# Altium PCB CPNPCB.PcbDoc
Units mil, origin at the board's own origin, x right, y up, seen from the top; angles counter-clockwise.
Board outline 5530 x 3630 mil, 2 copper layers (Top Layer, Bottom Layer); 24 components, 21 nets, 97 pads, 23 vias.
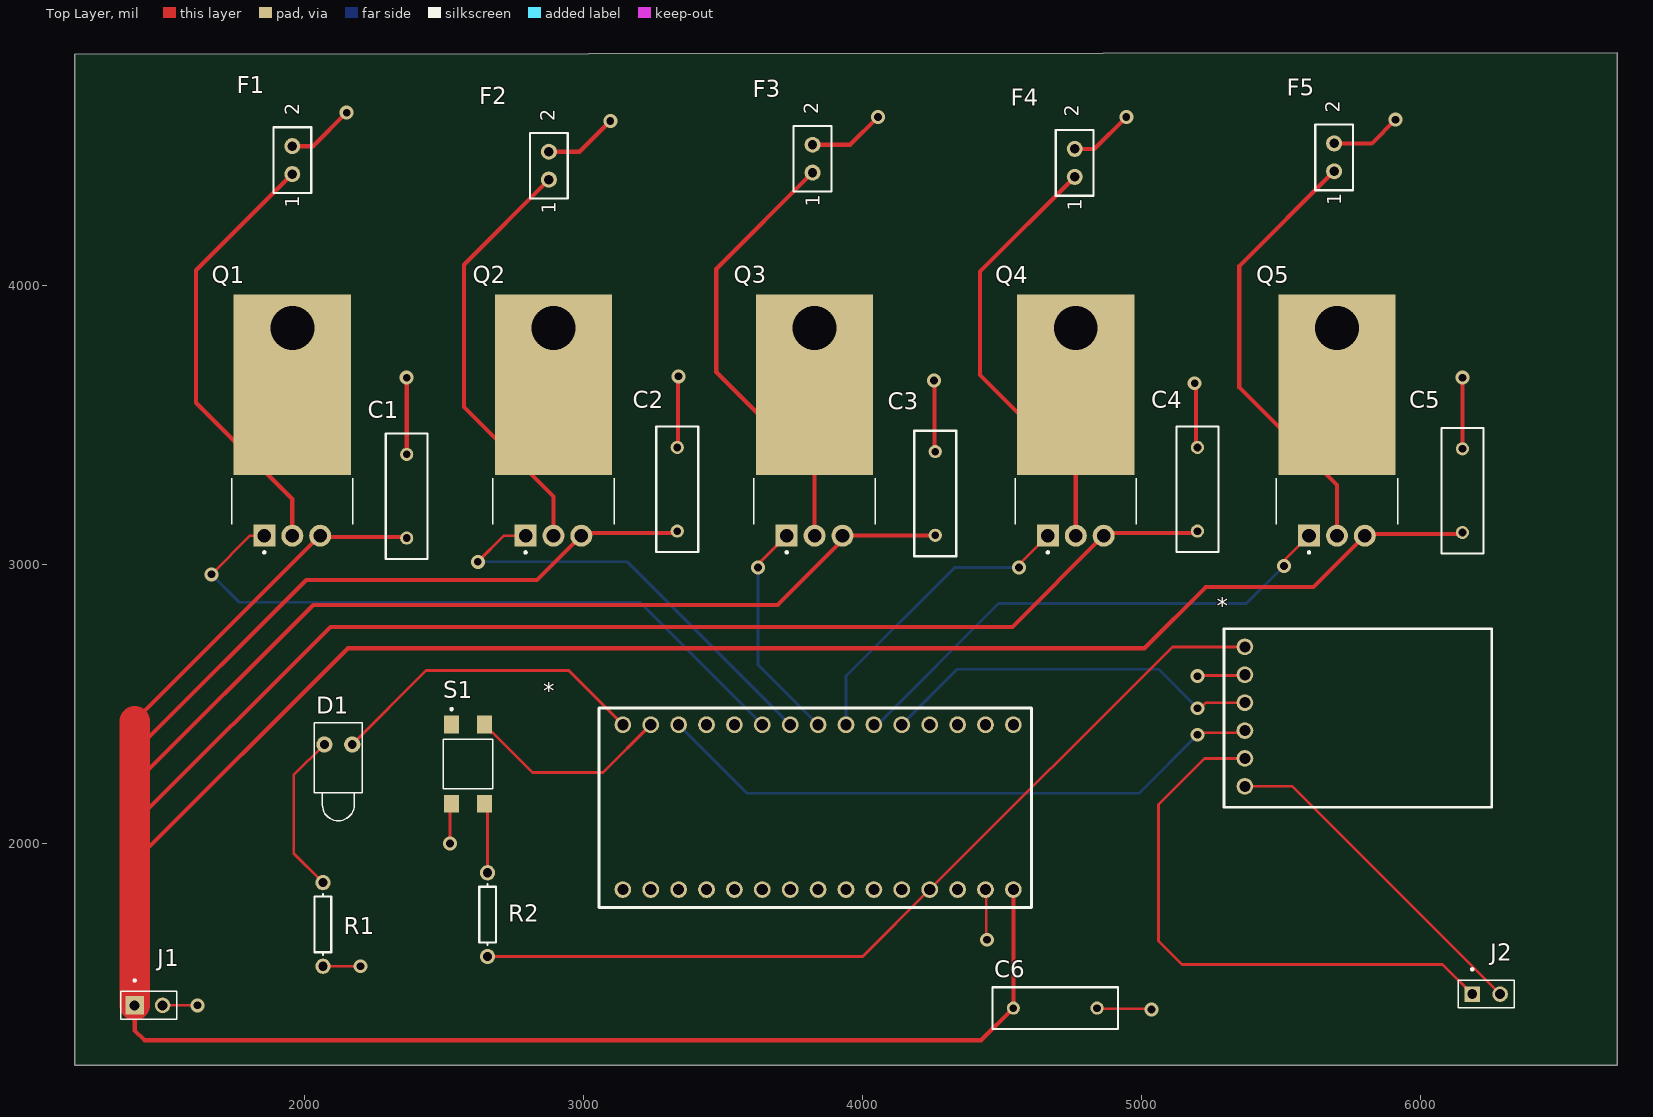
[diagram p0: Top Layer view]
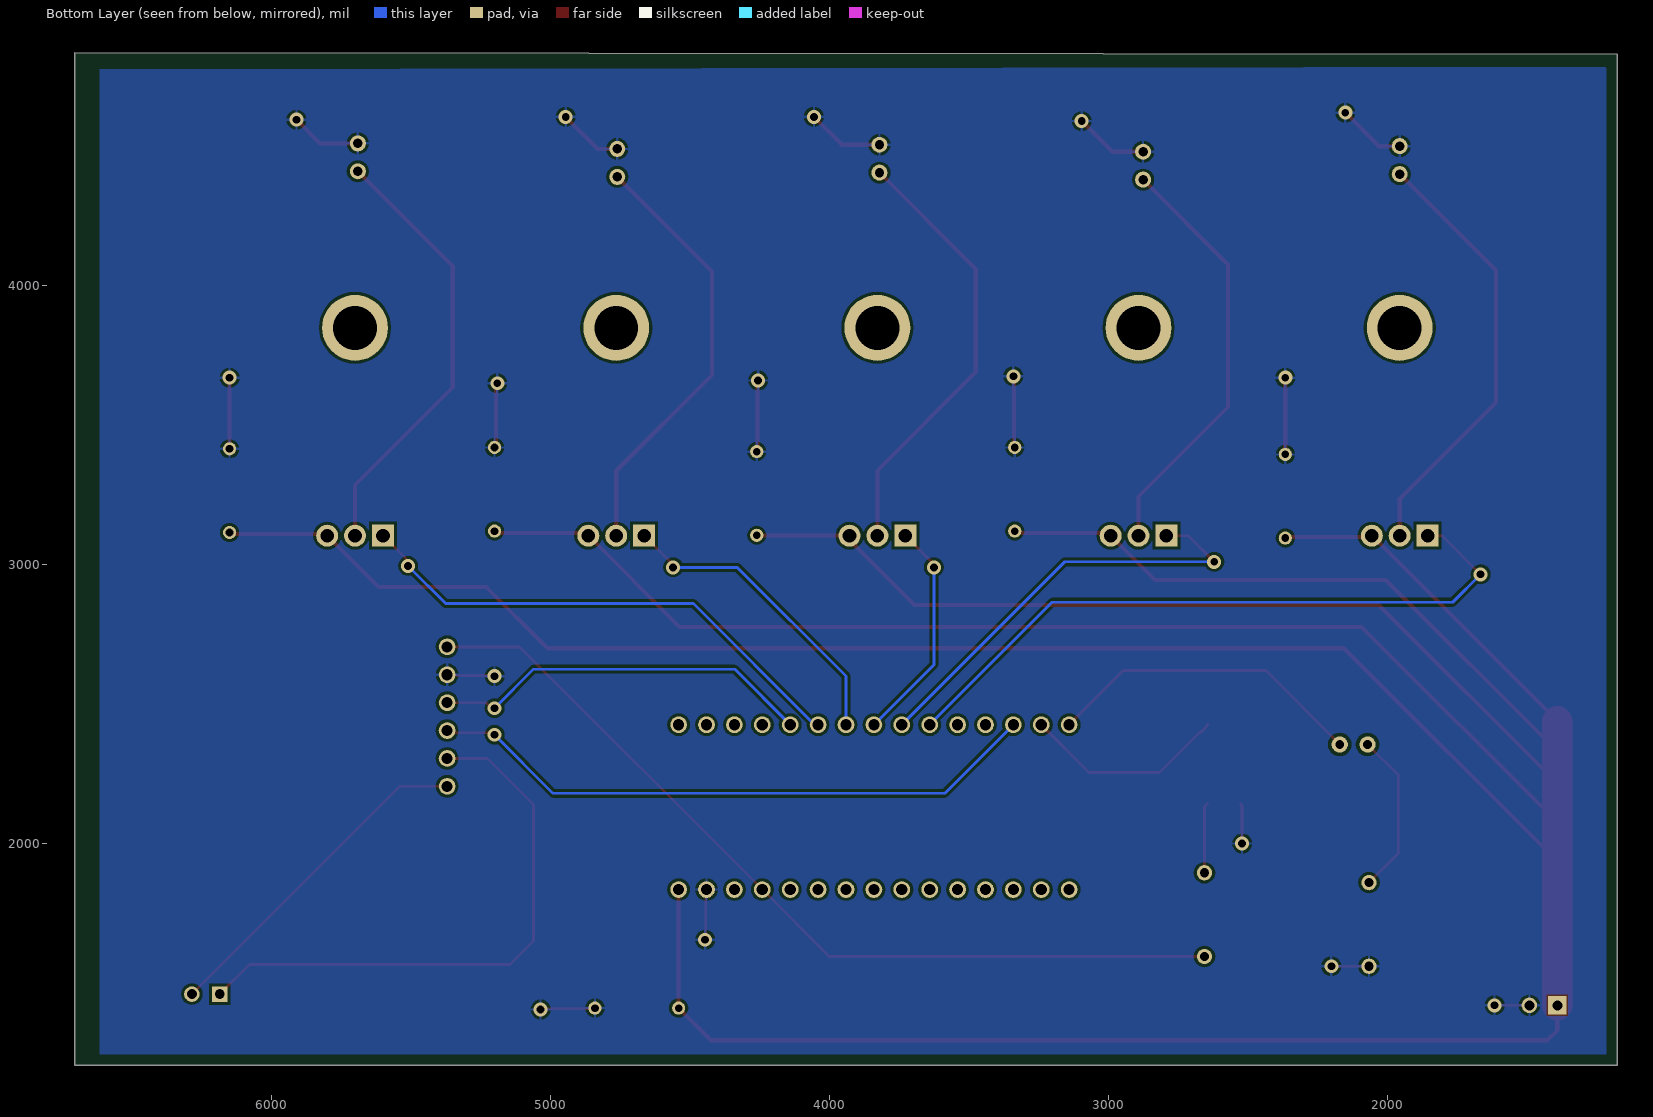
[diagram p1: Bottom Layer view, seen from below]

## Layer stack, top to bottom
Top Solder: solder mask 0.4, Solder Resist, Dk 3.5
Top Layer: signal copper 1.4
Dielectric 1: dielectric 12.6, FR-4, Dk 4.8
Bottom Layer: signal copper 1.4
Bottom Solder: solder mask 0.4, Solder Resist, Dk 3.5

## Board outline
1175,4830 1175,1205 6705,1205 6705,4835

## Design rules (kind name [scope] priority, off if disabled: settings)
BoardOutlineClearance [All] p1: gap=7.87 ignorepadtopadclearanceinfootprint=FALSE
Clearance [All] p1: gap=5 ignorepadtopadclearanceinfootprint=TRUE except(10: Arc-Hole Track-Hole SMDPad-Hole THPad-Hole Via-Hole Fill-Hole Poly-Hole Region-Hole Text-Hole)
ComponentClearance [All] p1: gap=5 collisioncheckmode=3 verticalgap=5 showdistances=TRUE
DiffPairsRouting [All] p1: maxlimit=10 minlimit=5 mostfreqgap=5 toplayer_minwidth=5 toplayer_maxwidth=1000 toplayer_prefwidth=5 bottomlayer_minwidth=5 bottomlayer_maxwidth=1000 bottomlayer_prefwidth=5 maxuncoupledlength=500
Height [All] p1: minheight=0 maxheight=71497.94 prefheight=500
HoleSize [All] p1: absolutevalues=TRUE maxlimit=248.03 minlimit=11.81 maxpercent=80.000 minpercent=20.000
HoleToHoleClearance [All] p1: gap=10 allowstackedmicrovias=FALSE
MinimumAnnularRing [All] p1: minimumring=6
MinimumSolderMaskSliver [All] p1: minsoldermaskwidth=6
PlaneClearance [All] p1: clearance=5
PlaneConnect PlaneConnectPowerPads [InPadClass('PowerPads')] p1: planeconnectstyle=Direct reliefexpansion=20 reliefentries=4 reliefconductorwidth=10 reliefairgap=10
PlaneConnect [All] p2: pad.planeconnectstyle=Relief pad.reliefexpansion=11.81 pad.reliefentries=4 pad.reliefconductorwidth=5 pad.reliefairgap=5 via.planeconnectstyle=Direct via.reliefexpansion=11.81 via.reliefentries=4 via.reliefconductorwidth=5 via.reliefairgap=5
PolygonConnect PolygonConnectPowerPads [All vs (InPadClass('PowerPads'))] p1: connectstyle=Direct reliefconductorwidth=10 reliefentries=4 polygonreliefangle="90 Angle" airgapwidth=10
PolygonConnect [All] p2: thpad.connectstyle=Relief thpad.reliefconductorwidth=5 thpad.reliefentries=4 thpad.polygonreliefangle="90 Angle" thpad.airgapwidth=5 smdpad.connectstyle=Relief smdpad.reliefconductorwidth=5 smdpad.reliefentries=4 smdpad.polygonreliefangle="90 Angle" smdpad.airgapwidth=5 via.connectstyle=Direct via.reliefconductorwidth=5 via.reliefentries=4 via.polygonreliefangle="90 Angle" via.airgapwidth=5
RoutingVias [All] p1: holewidth=11.81 width=23.62 viastyle="Through Hole" minholewidth=11.81 minwidth=23.62 maxholewidth=23.62 maxwidth=259.84
SilkToSilkClearance [All] p1: silktosilkclearance=5
SilkToSolderMaskClearance [IsPad] p1: minsilkscreentomaskgap=5 clearancetoexposedcopper=TRUE
SolderMaskExpansion [All] p1: expansion=2 istentingtop=FALSE
UnRoutedNet [All] p1: checkbadconnections=TRUE
Width Width_10mil [All] p1: maxlimit=1000 minlimit=10 preferedwidth=10 minimp=50.000000 maximp=50.000000 favimp=50.000000
Width Width_6mil [All] p2: maxlimit=1000 minlimit=6 preferedwidth=6 minimp=50.000000 maximp=50.000000 favimp=50.000000
Width Power_20mil [All] p3: maxlimit=1000 minlimit=20 preferedwidth=20 minimp=50.000000 maximp=50.000000 favimp=50.000000
Width Power_12mil [All] p4: maxlimit=1000 minlimit=12 preferedwidth=12 minimp=50.000000 maximp=50.000000 favimp=50.000000
Width Width_5mil [All] p5: maxlimit=1000 minlimit=5 preferedwidth=5 minimp=50.000000 maximp=50.000000 favimp=50.000000
19 further rules are at their usual default settings.

## Components (designator, comment, footprint, x,y, rotation, side; value= is the part's Value field where it differs from the comment)
* "MCP2551" MCP2551-Footprint-1 5570,2455 r0 top
* "NUCLEO-F303K8" NUCLEO-F303K8-Footprint-1 3790,2130.5 r270 top
C1 "Cap" RAD-0.3 2365,3245 r270 top value=1uF
C2 "Cap" RAD-0.3 3335,3270 r270 top value=100pF
C3 "Cap" RAD-0.3 4260,3255 r270 top value=100pF
C4 "Cap" RAD-0.3 5200,3270 r270 top value=100pF
C5 "Cap" RAD-0.3 6150,3265 r270 top value=100pF
C6 "Cap" RAD-0.3 4690,1410 r180 top value=100pF
D1 "LED1" LED-1 2120,2355 r270 top
F1 "SAMTEC-SLW-102-01-X-S" SAMTEC-SLW-102-01-X-S 1955,4450 r90 top
F2 "SAMTEC-SLW-102-01-X-S" SAMTEC-SLW-102-01-X-S 2875,4430 r90 top
F3 "SAMTEC-SLW-102-01-X-S" SAMTEC-SLW-102-01-X-S 3820,4455 r90 top
F4 "SAMTEC-SLW-102-01-X-S" SAMTEC-SLW-102-01-X-S 4760,4440 r90 top
F5 "SAMTEC-SLW-102-01-X-S" SAMTEC-SLW-102-01-X-S 5690,4460 r90 top
J1 "215297-2" TE_215297-2#1 1440,1420 r0 top
J2 "215297-2" TE_215297-2#2 6235,1460 r0 top
Q1 "CSD18502KCS" TO254P1651X1067X470-3 1855,3103.66 r0 top
Q2 "CSD18502KCS" TO254P1651X1067X470-3 2791.25,3103.66 r0 top
Q3 "CSD18502KCS" TO254P1651X1067X470-3 3727.5,3103.66 r0 top
Q4 "CSD18502KCS" TO254P1651X1067X470-3 4663.75,3103.66 r0 top
Q5 "CSD18502KCS" TO254P1651X1067X470-3 5600,3103.66 r0 top
R1 "Res1" AXIAL-0.3 2065,1710 r90 top value=300
R2 "Res1" AXIAL-0.3 2655,1745 r90 top value=1K
S1 "TL3305BF260QG" SW_TL3305BF260QG 2585,2285 r270 top

## Footprints (in the part's own frame and the unit in brackets; to place one, negate y for a bottom-side part, rotate by r counter-clockwise, add the part's x,y. Pads: shape width x height; smd on the part's side, far side on the other; paste and mask are expansions set on the pad)
AXIAL-0.3 [mm] "Axial Device, Thru-Hole; 2 Leads; 0.3 in Pin Spacing"
  round 1.4 hole 0.85: 1(-3.81,0) 2(3.81,0)
  silkscreen extent -2.77,-0.76 2.77,0.76
LED-1 [mil] "LED; 2 Leads"
  round 58 hole 31.5: 1(0,50) 2(0,-50)
  silkscreen extent -79,-87 274,87
MCP2551-Footprint-1 [mil]
  round 60 hole 40: 1(-200,250) 2(-200,150) 3(-200,50) 4(-200,-50) 5(-200,-150) 6(-200,-250)
  silkscreen extent -275,-325 685,315
NUCLEO-F303K8-Footprint-1 [mil]
  round 60 hole 40: 1(-295.5,750) 2(-295.5,650) 3(-295.5,550) 4(-295.5,450) 5(-295.5,350) 6(-295.5,250) 7(-295.5,150) 8(-295.5,50) 9(-295.5,-50) 10(-295.5,-150) 11(-295.5,-250) 12(-295.5,-350) 13(-295.5,-450) 14(-295.5,-550) 15(-295.5,-650) 16(295.5,-650) 17(295.5,-550) 18(295.5,-450) 19(295.5,-350) 20(295.5,-250) 21(295.5,-150) 22(295.5,-50) 23(295.5,50) 24(295.5,150) 25(295.5,250) 26(295.5,350) 27(295.5,450) 28(295.5,550) 29(295.5,650) 30(295.5,750)
  silkscreen extent -355,-735 360,815
RAD-0.3 [mm] "Radial Cap, Thru-Hole; 2 Leads; 0.3 in Pin Spacing"
  round 1.2 hole 0.7: 1(-3.81,0) 2(3.81,0)
  silkscreen extent -5.71,-1.91 5.71,1.91
SAMTEC-SLW-102-01-X-S [mm]
  round 1.46 hole 0.86 mask+0.051: 1(-1.27,0) 2(1.27,0)
  silkscreen extent -2.99,-1.72 2.99,1.72
SW_TL3305BF260QG [mm]
  rect 1.6x1.4 smd: 1(-3.6,-1.5) 2(3.6,-1.5) 3(-3.6,1.5) 4(3.6,1.5)
  silkscreen extent -5.1,-2.25 2.25,2.25, body extent -3.75,-2.25 3.75,2.25, height 5
TE_215297-2#1 [mil]
  rect 65x65 hole 35.43: 1(-50,0)
  round 55.43 hole 35.43: 2(50,0)
  silkscreen extent -100,-50 100,93, body extent -100,0 100,394, height 50
TE_215297-2#2 [mil]
  rect 55.43x55.43 hole 35.43: 1(-50,0)
  round 55.43 hole 35.43: 2(50,0)
  silkscreen extent -100,-50 100,93, body extent -100,0 100,394, height 50
TO254P1651X1067X470-3 [mm]
  rect 2x2 hole 1.24: 1(0,0)
  round 2 hole 1.24: 2(2.54,0) 3(5.08,0)
  rect 10.67x16.43 smd: 4(2.54,13.75)
  round 6 hole 4: 4.1(2.54,18.925)
  silkscreen extent -2.98,-1.62 8.06,5.22, body extent -5.08,0 5.08,4.55, height 19.65

## Part data
*: library part MCP2551-1
*: library part nucleof303k8-1, "Boards/Accessories"
C1 C2 C3 C4 C5 C6: "Capacitor", LatestRevisionDate=17-Jul-2002, LatestRevisionNote="Re-released for DXP Platform.", PackageDescription="Radial Cap, Thru-Hole; 2 Leads; 0.3 in Pin Spacing", PackageReference=RAD-0.3, Published=8-Jun-2000, Publisher="Altium Limited"
D1: "Typical RED GaAs LED", LatestRevisionDate=08-Jul-2005, LatestRevisionNote="Mech Layer 1 removed.", PackageDescription="LED; 2 Leads", PackageReference=LED-1, Published=8-Jun-2000, Publisher="Altium Limited"
F1 F2 F3 F4 F5 J1 J2 S1: Package=None, Availability=Unavailable, Price=None
  F1 F2 F3 F4 F5: MF="{'manufacturer': u'Samtec Inc.'}", MP=SAMTEC-SLW-102-01-X-S
  J1 J2: MF="{'manufacturer': u'TE Connectivity'}", MP=215297-2
  S1: MF="{'manufacturer': u'E-Switch'}", MP=TL3305BF260QG
Q1 Q2 Q3 Q4 Q5: "40-V, N-Channel NexFET Power MOSFETs 3-TO-220 -55 to 150", Package=None, Availability=Unavailable, MF="{'manufacturer': u'Texas Instruments'}", MP=CSD18502KCS, Price=None
R1 R2: "Resistor", LatestRevisionDate=17-Jul-2002, LatestRevisionNote="Re-released for DXP Platform.", PackageDescription="Axial Device, Thru-Hole; 2 Leads; 0.3 in Pin Spacing", PackageReference=AXIAL-0.3, Published=8-Jun-2000, Publisher="Altium Limited"

## Via types
v1: diameter 50, hole 28, Top Layer to Bottom Layer, 23 vias

## Nets (pads, with @x,y where several pads share a name; then routed paths per layer and width w, separated by ;. In a path a pad name is that pad's centre, name@x,y a point inside that pad or via, vN(x,y) a via of type N, cw(c..) or ccw(c..) an arc to the next point about the centre after c; other vN are vias at no path point)
CANH: *.5@5370,2305 J2.1 | length 2071.5
  Top Layer w10: *.5@5370,2305 5225,2305 5060,2140 5060,1650.86 5144.07,1566.79 6078.21,1566.79 J2.1
CANL: *.6@5370,2205 J2.2 | length 1223.6
  Top Layer w10: *.6@5370,2205 5540,2205 J2.2
CANRX: *.4@5370,2405 *.13 | length 2225.1
  Top Layer w10: v1(5200,2390) 5207.5,2397.5 5362.5,2397.5 *.4@5370,2405
  Bottom Layer w10: *.13 3586,2180 4990,2180 v1(5200,2390)
CANTX: *.3@5370,2505 *.5@4140,2426 | length 1378.7
  Top Layer w10: v1(5200,2485) 5210.82,2485 5230.82,2505 *.3@5370,2505
  Bottom Layer w10: *.5@4140,2426 4339,2625 5060,2625 v1(5200,2485)
D3: *.6@4040,2426 Q5.1 | length 1851.6
  Top Layer w10: v1(5510,2995) 5517.65,3002.65 5517.65,3021.32 Q5.1
  Bottom Layer w10: *.6@4040,2426 4052.57,2426 4486.57,2860 5375,2860 v1(5510,2995)
D4: *.7 Q4.1 | length 1112.2
  Top Layer w10: v1(4560,2990) 4560,2999.91 Q4.1
  Bottom Layer w10: *.7 3940,2600 4330,2990 v1(4560,2990)
D5: *.8 Q3.1 | length 809.2
  Top Layer w10: v1(3625,2990) 3632.65,2997.65 3632.65,3008.82 Q3.1
  Bottom Layer w10: v1(3625,2990) 3625,2641 *.8
D6: *.9 Q2.1 | length 1571.9
  Top Layer w10: v1(2620,3010) 2713.66,3103.66 Q2.1
  Bottom Layer w10: v1(2620,3010) 3156,3010 *.9
D7: *.10 Q1.1 | length 2445.7
  Top Layer w10: v1(1665,2965) 1803.66,3103.66 Q1.1
  Bottom Layer w10: v1(1665,2965) 1765,2865 3201,2865 *.10
GND: *.2@5370,2605 *.29 C1.1 C2.1 C3.1 C4.1 C5.1 C6.1 F1.2 F2.2 F3.2 F4.2 F5.2 J1.2 R1.1 S1.2 | length 3529.8
  Top Layer w10: J1.2 v1(1615,1420) ; R1.1 v1(2200,1560) ; v1(2520,2000) 2520,2137.32 S1.2 ; C2.1@3335,3440 C2.1 C2.1@3337.5,3422.5 ; v1@3337.5,3672.5 v1(3340,3675) ; v1(4255,3660) v1@4257.5,3657.5 ; C3.1@4257.5,3407.5 C3.1 ; *.29 4442.5,1832.5 4442.5,1657.5 v1(4445,1655) ; C6.1 4842.5,1407.5 5032.5,1407.5 v1(5035,1405) ; v1(5190,3650) v1@5195,3645 ; C4.1@5195,3425 C4.1 ; v1(5200,2600) 5202.5,2602.5 5367.5,2602.5 *.2@5370,2605
  Top Layer w15: F1.2 2030,4500 v1(2150,4620) ; C1.1 v1(2365,3670) ; F2.2 2985,4480 v1(3095,4590) ; C2.1@3337.5,3422.5 v1@3337.5,3672.5 ; F3.2 3955,4505 v1(4055,4605) ; C3.1@4257.5,3407.5 v1@4257.5,3657.5 ; F4.2 4830,4490 v1(4945,4605) ; C4.1@5195,3425 v1@5195,3645 ; F5.2 5825,4510 v1(5910,4595) ; C5.1 v1(6150,3670)
LVLine: *.30 C1.2 C2.2 C3.2 C4.2 C5.2 C6.2 J1.1 Q1.3 Q2.3 Q3.3 Q4.3 Q5.3 | length 21011.8
  Top Layer w15: J1.1 1390,1330 1425,1295 4425,1295 C6.2 *.30 ; 1390,1935 2155,2700 5010,2700 5230,2920 5616.34,2920 Q5.3 5805.67,3109.33 6144.33,3109.33 C5.2 ; 1390,2075 2091.49,2776.49 4536.58,2776.49 Q4.3 4872.96,3112.87 5192.87,3112.87 C4.2 ; 1390,2215 2030,2855 3695,2855 3927.5,3087.5 Q3.3 3928.17,3104.33 4259.33,3104.33 C3.2 ; 1390,2330 2005,2945 2832.59,2945 Q2.3 3000.46,3112.87 3327.87,3112.87 C2.2 ; 1390,2438.66 Q1.3 2059.33,3099.33 2360.67,3099.33 C1.2
  Top Layer w110: J1.1 1390,1935 1390,2075 1390,2215 1390,2330 1390,2438.66
Net*_1: *.1@5370,2705 *.27 R2.1 | length 3174.8
  Top Layer w10: R2.1 4000,1595 *.27 5110,2705 *.1@5370,2705
Net*_14: *.14 S1.3 | length 740.2
  Top Layer w10: S1.3 2644.06,2422.8 2666.61,2400.24 2670.55,2400.24 2815.79,2255 3069,2255 *.14
Net*_15: *.15 D1.1 | length 1160.1
  Top Layer w10: D1.1 2435,2620 2946,2620 *.15
NetD1_2: D1.2 R1.2 | length 584.1
  Top Layer w10: R1.2 1960,1965 1960,2245 D1.2
NetF1_1: F1.1 Q1.2 Q1.4 Q1.4.1 | length 1582.1
  Top Layer w15: Q1.2 1955,3235 1610,3580 1610,4055 F1.1
NetF2_1: F2.1 Q2.2 Q2.4 Q2.4.1 | length 1535.7
  Top Layer w15: F2.1 2570,4075 2570,3565 2891.25,3243.75 Q2.2
NetF3_1: F3.1 Q3.2 Q3.4 Q3.4.1 | length 1590.3
  Top Layer w15: F3.1 3475,4060 3475,3690 3827.5,3337.5 Q3.2
NetF4_1: F4.1 Q4.2 Q4.4 Q4.4.1 | length 1569.6
  Top Layer w15: F4.1 4420,4050 4420,3680 4763.75,3336.25 Q4.2
NetF5_1: F5.1 Q5.2 Q5.4 Q5.4.1 | length 1592.1
  Top Layer w15: F5.1 5350,4070 5350,3635 5700,3285 Q5.2
NetR2_2: R2.2 S1.4 | length 252.8
  Top Layer w10: S1.4 2655,2132.32 R2.2
pads on no net: *.1@4540,2426 *.2@4440,2426 *.3@4340,2426 *.4@4240,2426 *.11 *.12 *.16 *.17 *.18 *.19 *.20 *.21 *.22 *.23 *.24 *.25 *.26 *.28 S1.1

## Polygon pours and split planes (outlines as drawn)
GND on Bottom Layer "GND_L02_P000" (solid, pour order 0): 1220,4785 1215,4780 1215,1245 6615,1245 6615,4775

## Text inside footprints (layer, text, board x,y; h text height)
F1: Top Overlay "1" at 1980,4278.35 h50 r90; Top Overlay "2" at 1980,4610 h50 r90; Mechanical 13 "1" at 1980,4278.35 h50 r90; Mechanical 13 "2.540" at 1960,4237.01 h10 r90; Mechanical 13 "2.540" at 1850,4296.5 h10 r90; Mechanical 13 "5.080" at 2068.31,4424.02 h10 r90; Mechanical 13 "2" at 1965,4630 h50 r90
F2: Top Overlay "1" at 2900,4258.35 h50 r90; Top Overlay "2" at 2895,4590 h50 r90; Mechanical 13 "1" at 2900,4258.35 h50 r90; Mechanical 13 "2.540" at 2880,4217.01 h10 r90; Mechanical 13 "2.540" at 2770,4276.5 h10 r90; Mechanical 13 "5.080" at 2988.31,4404.02 h10 r90; Mechanical 13 "2" at 2885,4610 h50 r90
F3: Top Overlay "1" at 3845,4283.35 h50 r90; Top Overlay "2" at 3840,4615 h50 r90; Mechanical 13 "1" at 3845,4283.35 h50 r90; Mechanical 13 "2.540" at 3825,4242.01 h10 r90; Mechanical 13 "2.540" at 3715,4301.5 h10 r90; Mechanical 13 "5.080" at 3933.31,4429.02 h10 r90; Mechanical 13 "2" at 3850,4620 h50 r90
F4: Top Overlay "1" at 4785,4268.35 h50 r90; Top Overlay "2" at 4775,4605 h50 r90; Mechanical 13 "1" at 4785,4268.35 h50 r90; Mechanical 13 "2.540" at 4765,4227.01 h10 r90; Mechanical 13 "2.540" at 4655,4286.5 h10 r90; Mechanical 13 "5.080" at 4873.31,4414.02 h10 r90; Mechanical 13 "2" at 4750,4615 h50 r90
F5: Top Overlay "1" at 5715,4288.35 h50 r90; Top Overlay "2" at 5710,4620 h50 r90; Mechanical 13 "1" at 5715,4288.35 h50 r90; Mechanical 13 "2.540" at 5695,4247.01 h10 r90; Mechanical 13 "2.540" at 5585,4306.5 h10 r90; Mechanical 13 "5.080" at 5803.31,4434.02 h10 r90; Mechanical 13 "2" at 5710,4625 h50 r90